# Altium PCB BASE.PcbDoc (part 3 of 5)
Units mil, origin at the board's own origin, x right, y up, seen from the top; angles counter-clockwise.
Board outline 4330.71 x 3937.01 mil, 6 copper layers (Top, GND1, SIG1, PWR, GND2, Bottom), stack 32.112 mil thick; 57 components, 250 nets, 665 pads, 350 vias.
Unrouted connection lines stored in the file: 2.
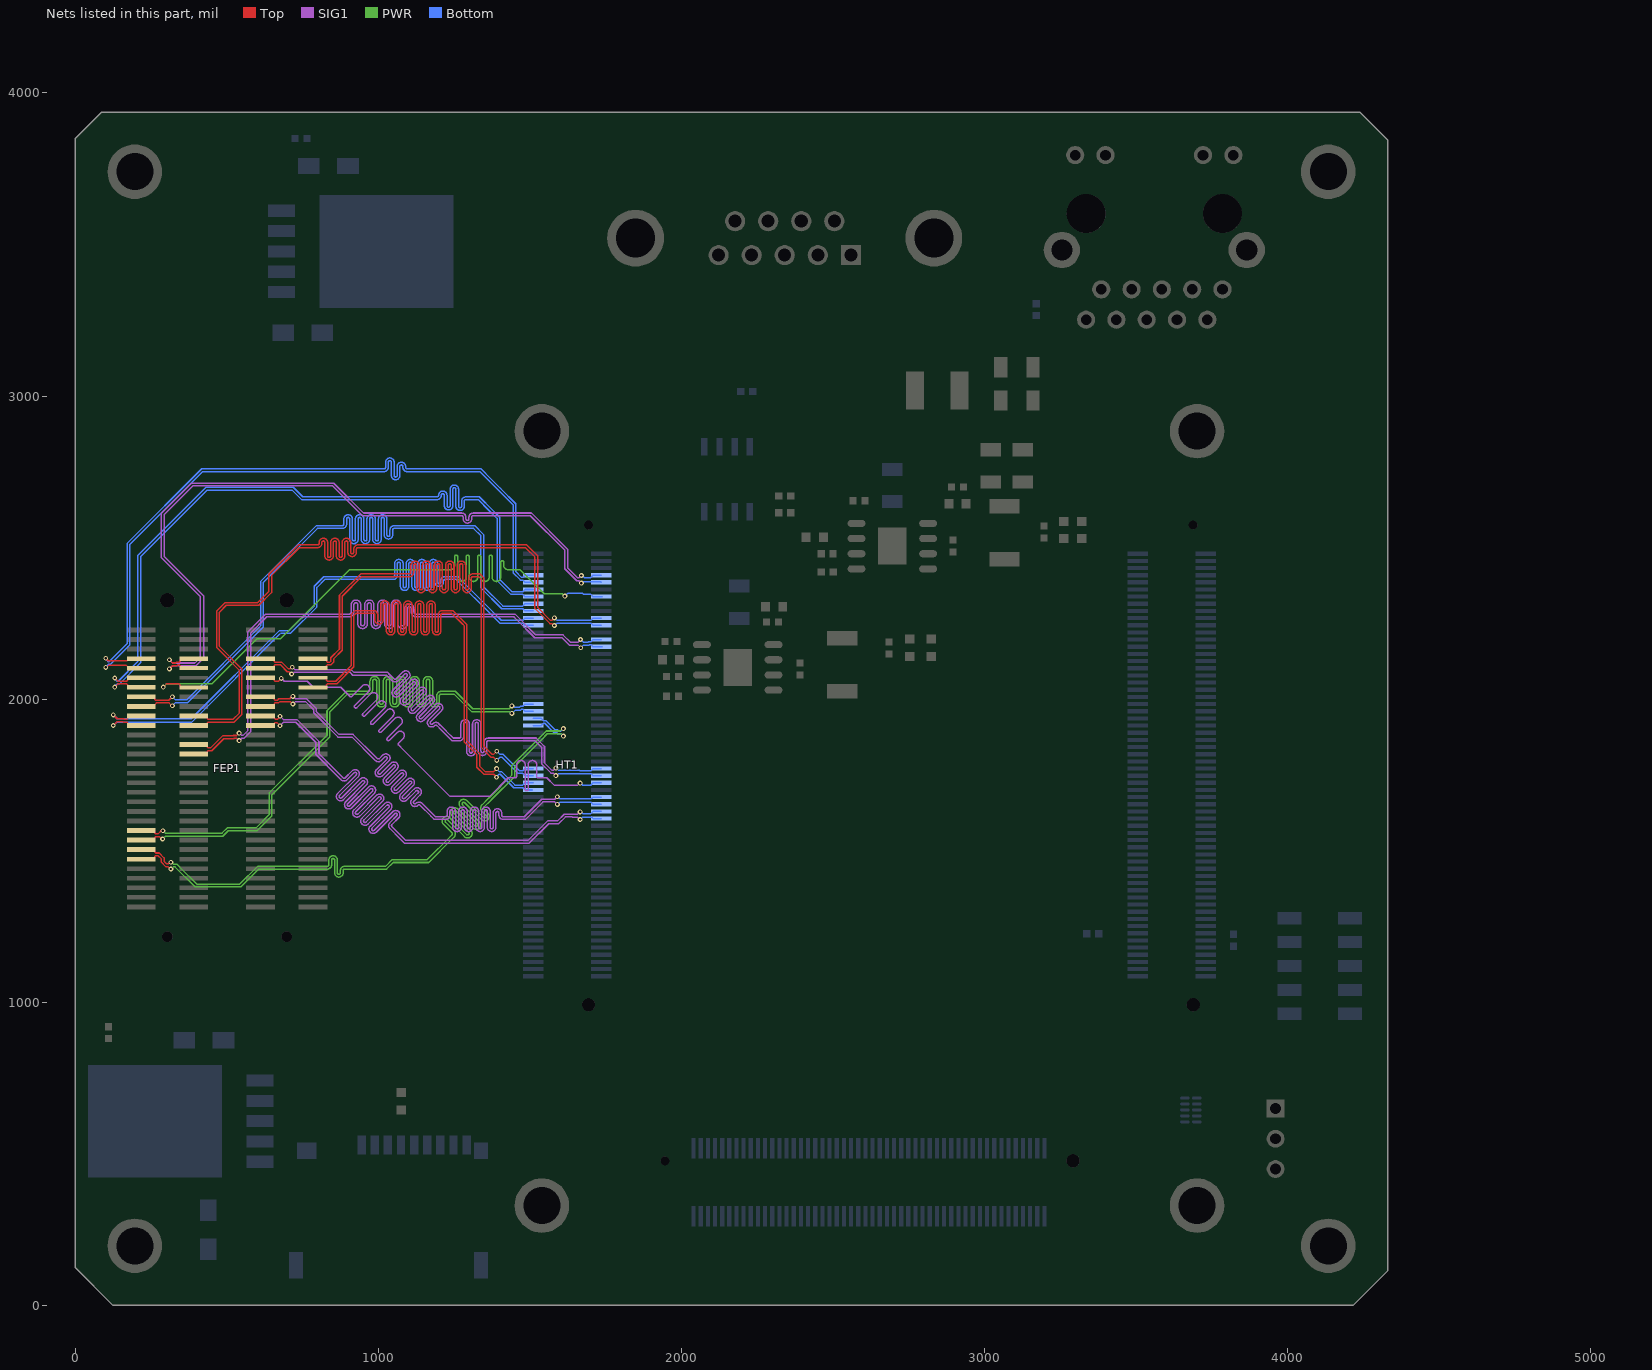
[diagram p7: the nets of this part, all layers, seen from the top]

## Via types
v1: diameter 16, hole 8, Top to Bottom, 219 vias
v2: diameter 30, hole 15, Top to Bottom, 75 vias
v3: diameter 22, hole 12, Top to Bottom, 48 vias
v4: diameter 28, hole 14, Top to Bottom, 3 vias
v5: diameter 39.37, hole 39.37, Top to Bottom, 2 vias
v6: diameter 24, hole 12, Top to Bottom, 2 vias
v7: diameter 40, hole 20, Top to Bottom, 1 vias

## Nets (pads, with @x,y where several pads share a name; then routed paths per layer and width w, separated by ;. In a path a pad name is that pad's centre, name@x,y a point inside that pad or via, vN(x,y) a via of type N, cw(c..) or ccw(c..) an arc to the next point about the centre after c; other vN are vias at no path point) (continued)
B12_L19_P: FEP1.B6 HT1.B28 | length 2434.1
  Top w5: FEP1.B6@611.18,2070.87 650.55,2070.87 655.93,2065.49 655.93,2062.55 658.85,2059.62 671.01,2059.62 679.87,2068.47 v1(679.87,2068.88)
  SIG1 w5: v1(679.87,2068.88) 680.27,2068.88 689.51,2059.64 765.54,2059.64 785.47,2039.71 876,2039.71 900.98,2014.73 905.91,2009.8 ccw(c909.47,2013.31) 913.02,2009.8 947.62,2044.4 ; 929.32,1972.36 cw(c925.79,1975.9) 922.26,1972.35 cw(c925.79,1975.9) 922.25,1979.43 967.42,2024.6 ccw(c957.55,2034.53) 967.45,2044.43 ccw(c957.55,2034.53) 947.63,2044.41 ; 929.35,1972.39 974.49,2017.53 cw(c984.42,2007.66) 994.32,2017.56 cw(c984.42,2007.66) 994.3,1997.74 949.15,1952.59 ; 949.12,1952.56 ccw(c952.66,1949.03) 949.11,1945.5 ccw(c952.66,1949.03) 956.19,1945.49 1001.36,1990.66 cw(c1011.29,1980.79) 1021.19,1990.69 cw(c1011.29,1980.79) 1021.17,1970.87 976.02,1925.72 ccw(c979.53,1922.16) 975.98,1918.63 ; 976,1918.61 ccw(c979.53,1922.16) 983.06,1918.62 ; 983.09,1918.65 1028.23,1963.79 cw(c1038.16,1953.92) 1048.06,1963.82 cw(c1038.16,1953.92) 1048.04,1944 1002.89,1898.85 ; 1002.86,1898.82 ccw(c1006.4,1895.29) 1002.85,1891.76 ccw(c1006.4,1895.29) 1009.93,1891.75 ; 1009.96,1891.78 1055.1,1936.92 ; 1029.72,1864.89 cw(c1033.27,1868.42) 1029.73,1871.95 ; 1029.74,1864.87 ccw(c1033.27,1868.42) 1036.8,1864.88 1062.3,1890.38 ; 1029.76,1871.98 1074.9,1917.12 ; 1055.11,1936.93 cw(c1065.03,1927.05) 1074.93,1936.95 cw(c1065.03,1927.05) 1074.91,1917.13 ; 1062.31,1890.39 cw(c1072.22,1880.5) 1082.12,1890.4 cw(c1072.22,1880.5) 1082.11,1870.59 ; 1082.1,1870.58 1067.17,1855.66 ccw(c1070.68,1852.09) 1067.16,1848.55 1081.69,1834.02 1150.46,1765.25 1235.2,1680.51 1368.07,1680.51 1428.34,1740.79 1444.48,1740.79 1451.48,1740.79 ccw(c1451.48,1745.79) 1456.48,1745.79 1456.48,1784.09 cw(c1470.48,1784.09) 1484.48,1784.09 1484.48,1702.67 ccw(c1489.48,1702.67) 1494.48,1702.67 1494.48,1784.09 cw(c1508.48,1784.09) 1522.48,1784.09 1522.48,1745.79 ccw(c1527.48,1745.79) 1527.48,1740.79 1549.66,1740.79 1555.8,1740.79 1580.76,1715.82 1657.28,1715.82 1664.61,1723.15 v1(1665.71,1723.15)
  Bottom w5: v1(1665.71,1723.15) 1667.46,1723.15 1674.14,1716.47 1700.84,1716.47 1708.54,1724.17 HT1.B28@1735.12,1724.17
B12_L20_N: FEP1.A5 HT1.A29 | length 2434.1
  Top w5: FEP1.A5@784.41,2102.36 824.98,2102.36 828.98,2106.36 828.98,2110.68 831.91,2113.61 844.03,2113.61 852.23,2121.81 852.23,2132.94 880.95,2161.66 880.95,2339.68 945.71,2404.43 1048.46,2404.43 1102.69,2404.43 ccw(c1102.69,2418.43) 1116.69,2418.43 1116.69,2441.28 cw(c1121.69,2441.28) 1126.69,2441.28 1126.69,2365.56 ccw(c1140.69,2365.56) 1154.69,2365.56 1154.69,2442 cw(c1159.69,2442) 1164.69,2442 1164.69,2365.56 ccw(c1178.69,2365.56) 1192.69,2365.56 1192.69,2442 cw(c1197.69,2442) 1202.69,2442 1202.69,2365.56 ccw(c1216.69,2365.56) 1230.69,2365.56 1230.69,2442 cw(c1235.69,2442) 1240.69,2442 1240.69,2365.56 ccw(c1254.69,2365.56) 1268.69,2365.56 1268.69,2442 cw(c1273.69,2442) 1278.69,2442 1278.69,2365.56 ccw(c1292.69,2365.56) 1306.69,2365.56 1306.69,2399.43 cw(c1311.69,2399.43) 1311.69,2404.43 1318.69,2404.43 1330.14,2404.43 1330.71,2405 1339.12,2396.59 1339.12,1841.93 1372.2,1808.85 1380.21,1808.85 v1(1390.71,1798.35)
  Bottom w5: v1(1390.71,1798.35) 1401.21,1808.85 1408.18,1808.85 1461.92,1755.11 1476.82,1755.11 1484.13,1747.8 HT1.A29@1510.71,1747.8
B12_L20_P: FEP1.A4 HT1.A30 | length 2433.3
  Top w5: FEP1.A4@784.41,2133.86 823.78,2133.86 829.15,2128.48 829.15,2125.54 832.08,2122.61 840.3,2122.61 843.23,2125.54 843.23,2136.67 871.95,2165.39 871.95,2343.41 941.98,2413.43 1048.46,2413.43 1102.69,2413.43 ccw(c1102.69,2418.43) 1107.69,2418.43 1107.69,2441.28 cw(c1121.69,2441.28) 1135.69,2441.28 1135.69,2365.56 ccw(c1140.69,2365.56) 1145.69,2365.56 1145.69,2442 cw(c1159.69,2442) 1173.69,2442 1173.69,2365.56 ccw(c1178.69,2365.56) 1183.69,2365.56 1183.69,2442 cw(c1197.69,2442) 1211.69,2442 1211.69,2365.56 ccw(c1216.69,2365.56) 1221.69,2365.56 1221.69,2442 cw(c1235.69,2442) 1249.69,2442 1249.69,2365.56 ccw(c1254.69,2365.56) 1259.69,2365.56 1259.69,2442 cw(c1273.69,2442) 1287.69,2442 1287.69,2365.56 ccw(c1292.69,2365.56) 1297.69,2365.56 1297.69,2399.43 cw(c1311.69,2399.43) 1311.69,2413.43 1318.69,2413.43 1326.42,2413.43 1326.98,2414 1334.44,2414 1348.12,2400.32 1348.12,1845.66 1375.93,1817.85 1380.21,1817.85 v1(1390.71,1828.35)
  Bottom w5: v1(1390.71,1828.35) 1401.21,1817.85 1411.9,1817.85 1465.64,1764.11 1476.82,1764.11 1484.13,1771.42 HT1.A30@1510.71,1771.42
B12_L21_N: FEP1.A7 HT1.A27 | length 2433.9
  Top w5: FEP1.A7@784.41,2039.37 824.98,2039.37 828.98,2043.37 828.98,2047.69 831.91,2050.62 863.04,2050.62 919.2,2106.78 919.2,2275.76 927.07,2283.64 983.71,2283.64 cw(c983.71,2278.64) 988.71,2278.64 988.71,2261.9 ccw(c1002.71,2261.9) 1016.71,2261.9 1016.71,2310.22 cw(c1021.71,2310.22) 1026.71,2310.22 1026.71,2226.06 ccw(c1040.71,2226.06) 1054.71,2226.06 1054.71,2310.22 cw(c1059.71,2310.22) 1064.71,2310.22 1064.71,2226.06 ccw(c1078.71,2226.06) 1092.71,2226.06 1092.71,2310.22 cw(c1097.71,2310.22) 1102.71,2310.22 1102.71,2226.06 ccw(c1116.71,2226.06) 1130.71,2226.06 1130.71,2310.22 cw(c1135.71,2310.22) 1140.71,2310.22 1140.71,2226.06 ccw(c1154.71,2226.06) 1168.71,2226.06 1168.71,2310.22 cw(c1173.71,2310.22) 1178.71,2310.22 1178.71,2226.06 ccw(c1192.71,2226.06) 1206.71,2226.06 1206.71,2278.64 cw(c1211.71,2278.64) 1211.71,2283.64 1241.89,2283.64 1278.37,2247.15 1282.71,2242.81 1282.71,1860.02 1325.07,1817.66 1325.07,1775.64 1348.31,1752.4 1380.56,1752.4 1389.98,1742.97 v1(1389.98,1742.83)
  Bottom w5: v1@1386.56,1744.78 1388.51,1742.83 v1(1389.98,1742.83) 1389.98,1744.19 1398.19,1752.4 1402.33,1752.4 1446.87,1707.86 1476.82,1707.86 1484.13,1700.55 HT1.A27@1506.98,1700.55
B12_L21_P: FEP1.A6 HT1.A28 | length 2433.3
  Top w5: FEP1.A6@784.41,2070.87 824.98,2070.87 828.98,2066.87 828.98,2062.55 831.91,2059.62 859.31,2059.62 910.2,2110.51 910.2,2279.49 923.34,2292.64 983.71,2292.64 cw(c983.71,2278.64) 997.71,2278.64 997.71,2261.9 ccw(c1002.71,2261.9) 1007.71,2261.9 1007.71,2310.22 cw(c1021.71,2310.22) 1035.71,2310.22 1035.71,2226.06 ccw(c1040.71,2226.06) 1045.71,2226.06 1045.71,2310.22 cw(c1059.71,2310.22) 1073.71,2310.22 1073.71,2226.06 ccw(c1078.71,2226.06) 1083.71,2226.06 1083.71,2310.22 cw(c1097.71,2310.22) 1111.71,2310.22 1111.71,2226.06 ccw(c1116.71,2226.06) 1121.71,2226.06 1121.71,2310.22 cw(c1135.71,2310.22) 1149.71,2310.22 1149.71,2226.06 ccw(c1154.71,2226.06) 1159.71,2226.06 1159.71,2310.22 cw(c1173.71,2310.22) 1187.71,2310.22 1187.71,2226.06 ccw(c1192.71,2226.06) 1197.71,2226.06 1197.71,2278.64 cw(c1211.71,2278.64) 1211.71,2292.64 1245.61,2292.64 1291.71,2246.54 1291.71,1863.75 1334.07,1821.39 1334.07,1779.36 1352.04,1761.4 1380.56,1761.4 1390.13,1770.97 v1(1390.27,1770.97)
  Bottom w5: v1(1390.27,1770.97) 1390.27,1769.61 1398.48,1761.4 1406.06,1761.4 1450.6,1716.86 1476.82,1716.86 1484.13,1724.17 HT1.A28@1510.71,1724.17
B12_L22_N: FEP1.B11 HT1.B23 | length 2432.5
  Top w5: FEP1.B11@611.18,1913.39 650.55,1913.39 659.08,1921.91 667.28,1921.91 675.71,1913.48 v1(675.71,1912.63)
  SIG1 w5: v1(675.71,1912.63) 686.92,1923.85 727.89,1923.85 777.13,1874.61 793.47,1858.27 793.47,1818.12 872.3,1739.29 875.94,1735.65 877.22,1734.37 ccw(c887.15,1744.24) 897.08,1734.36 919.91,1757.2 ; 919.94,1757.22 cw(c923.48,1753.69) 926.99,1757.24 ; 926.99,1750.13 865.6,1688.75 ccw(c875.48,1678.82) 865.58,1668.92 ccw(c875.48,1678.82) 885.39,1668.94 946.78,1730.33 ; 927.01,1750.15 ccw(c923.48,1753.69) 927.03,1757.2 ; 946.21,1608.13 ccw(c956.09,1598.21) 946.19,1588.31 ccw(c956.09,1598.21) 966,1588.33 ; 946.21,1608.14 1007.6,1669.52 ; 946.81,1730.35 cw(c950.35,1726.82) 953.86,1730.37 ; 953.86,1723.26 892.47,1661.88 ccw(c902.35,1651.95) 892.45,1642.05 ccw(c902.35,1651.95) 912.26,1642.07 973.65,1703.46 ; 953.88,1723.28 ccw(c950.35,1726.82) 953.9,1730.33 ; 966.01,1588.34 1027.39,1649.72 ; 973.07,1581.26 ccw(c982.96,1571.34) 973.06,1561.44 ccw(c982.96,1571.34) 992.87,1561.46 1053.87,1622.46 ; 973.08,1581.27 1034.46,1642.65 ; 973.68,1703.48 cw(c977.21,1699.95) 980.73,1703.5 ; 980.73,1696.39 919.34,1635.01 ccw(c929.22,1625.08) 919.32,1615.18 ccw(c929.22,1625.08) 939.13,1615.2 1000.52,1676.59 ; 980.75,1696.41 ccw(c977.22,1699.95) 980.77,1703.46 ; 1000.55,1676.61 cw(c1004.08,1673.08) 1007.6,1676.63 ; 1007.62,1669.54 ccw(c1004.09,1673.08) 1007.64,1676.59 ; 1027.42,1649.74 cw(c1030.95,1646.21) 1034.47,1649.76 ; 1034.49,1642.67 ccw(c1030.95,1646.21) 1034.51,1649.72 ; 1053.9,1622.48 cw(c1057.43,1618.95) 1060.95,1622.5 ; 1060.99,1622.46 cw(c1057.43,1618.95) 1060.97,1615.41 1038.5,1592.94 ccw(c1048.37,1583.02) 1038.5,1573.09 1056.44,1555.15 1060.08,1551.52 1086.59,1525 1497.56,1525 1561.91,1589.35 1594.63,1589.35 1617.07,1611.79 1639.98,1611.79 1641.16,1610.6 1657.28,1610.6 1664.73,1603.15 v1(1665.71,1603.15)
  Bottom w5: v1(1665.71,1603.15) 1666.29,1603.15 1674.14,1611 1701.22,1611 1701.77,1610.45 1704.15,1610.45 1708.54,1606.06 HT1.B23@1735.12,1606.06
B12_L22_P: FEP1.B10 HT1.B24 | length 2433.7
  Top w5: FEP1.B10@611.18,1944.88 650.55,1944.88 661.19,1934.24 667.75,1934.24 675.71,1942.2 v1(675.71,1944.06)
  SIG1 w5: v1(675.71,1944.06) 686.92,1932.85 731.62,1932.85 777.42,1887.04 804.32,1860.14 804.32,1819.99 878.67,1745.65 882.3,1742.02 883.6,1740.72 ccw(c887.15,1744.24) 890.71,1740.72 913.55,1763.56 cw(c923.48,1753.69) 933.37,1763.59 cw(c923.48,1753.69) 933.36,1743.77 871.97,1682.38 ; 871.95,1675.28 ccw(c875.48,1678.82) 879.01,1675.29 ; 871.94,1675.29 cw(c875.48,1678.82) 871.94,1682.36 ; 879.04,1675.31 940.42,1736.69 cw(c950.35,1726.82) 960.24,1736.72 cw(c950.35,1726.82) 960.23,1716.9 898.84,1655.51 ; 898.81,1655.49 ccw(c902.35,1651.95) 898.81,1648.42 ccw(c902.35,1651.95) 905.88,1648.42 ; 905.91,1648.44 967.29,1709.82 ; 925.68,1621.55 cw(c929.22,1625.08) 925.68,1628.62 ; 925.69,1621.54 ccw(c929.22,1625.08) 932.75,1621.55 994.16,1682.95 cw(c1004.08,1673.08) 1013.98,1682.98 cw(c1004.09,1673.08) 1013.97,1663.16 952.58,1601.77 ccw(c956.09,1598.21) 952.55,1594.68 ; 925.71,1628.64 987.09,1690.02 ; 952.56,1594.67 ccw(c956.09,1598.21) 959.62,1594.68 ; 959.65,1594.7 1021.03,1656.08 ; 967.3,1709.83 cw(c977.21,1699.95) 987.11,1709.85 cw(c977.22,1699.95) 987.1,1690.03 ; 979.42,1574.88 ccw(c982.96,1571.34) 979.42,1567.81 ccw(c982.96,1571.34) 986.49,1567.81 ; 979.45,1574.9 1040.83,1636.28 ; 986.52,1567.83 1047.51,1628.82 ; 1021.04,1656.09 cw(c1030.95,1646.21) 1040.85,1656.11 cw(c1030.95,1646.21) 1040.84,1636.29 ; 1047.52,1628.83 cw(c1057.43,1618.95) 1067.33,1628.85 cw(c1057.43,1618.95) 1067.32,1609.03 ; 1067.31,1609.02 1044.86,1586.58 ccw(c1048.37,1583.02) 1044.85,1579.47 1062.81,1561.51 1066.44,1557.88 1084.36,1539.95 1090.32,1534 1493.83,1534 1558.18,1598.35 1590.91,1598.35 1613.34,1620.79 1657.28,1620.79 1664.64,1628.15 v1(1665.71,1628.15)
  Bottom w5: v1(1665.71,1628.15) 1668.54,1628.15 1674.14,1622.56 1701.41,1622.56 1708.54,1629.68 HT1.B24@1735.12,1629.68
B12_L23_N: FEP1.B9 HT1.B25 | length 2442.8
  Top w5: FEP1.B9@607.45,1976.38 FEP1.B9@611.18,1976.38 650.55,1976.38 655.93,1981.75 655.93,1984.7 658.85,1987.63 670.8,1987.63 675.52,1992.35 709.63,1992.35 717.78,1984.2 v1(718.06,1984.2) ; v1@714.52,1986.3 v1@717.81,1983.01
  SIG1 w5: v1(718.06,1984.2) 718.33,1984.2 726.48,1992.35 759.36,1992.35 786.71,1965 786.71,1955.27 866.98,1875 912.98,1875 985.06,1802.92 989.98,1798 ccw(c999.91,1807.87) 1009.83,1797.99 1021.14,1809.3 cw(c1024.7,1805.79) 1028.22,1809.34 ; 1020.45,1740.73 ccw(c1030.34,1730.81) 1020.44,1720.91 ccw(c1030.34,1730.81) 1040.25,1720.93 1074.88,1755.56 ; 1020.46,1740.74 1055.08,1775.35 ; 1028.21,1802.22 993.59,1767.61 ccw(c1003.47,1757.68) 993.57,1747.78 ccw(c1003.47,1757.68) 1013.38,1747.8 1048.01,1782.43 ; 1028.24,1802.25 ccw(c1024.7,1805.79) 1028.26,1809.3 ; 1047.32,1713.86 ccw(c1057.21,1703.94) 1047.31,1694.04 ccw(c1057.21,1703.94) 1067.12,1694.06 1101.75,1728.69 cw(c1105.31,1725.18) 1108.83,1728.73 ; 1047.33,1713.87 1081.95,1748.48 ccw(c1078.44,1752.05) 1082,1755.56 ; 1048.03,1782.45 cw(c1051.57,1778.92) 1055.09,1782.47 cw(c1051.57,1778.92) 1055.11,1775.38 ; 1074.9,1755.58 cw(c1078.44,1752.05) 1081.96,1755.6 ; 1108.82,1721.61 1074.2,1687 ccw(c1084.08,1677.07) 1074.18,1667.17 ccw(c1084.08,1677.07) 1093.99,1667.19 1124.25,1697.45 cw(c1127.81,1693.94) 1131.33,1697.49 ; 1108.85,1721.64 ccw(c1105.31,1725.18) 1108.87,1728.69 ; 1131.32,1690.38 1110.95,1670.01 ccw(c1120.83,1660.08) 1110.93,1650.18 ccw(c1120.83,1660.08) 1130.74,1650.2 cw(c1134.26,1646.65) 1137.81,1650.17 1173.34,1614.64 ; 1131.35,1690.4 ccw(c1127.81,1693.94) 1131.37,1697.46 ; 1173.37,1614.61 1178.3,1609.68 1184.55,1603.43 1214.94,1603.43 1221.94,1603.43 ccw(c1221.94,1617.43) 1235.94,1617.43 1235.94,1630.19 cw(c1240.94,1630.19) 1245.94,1630.19 1245.94,1577.37 ccw(c1259.94,1577.37) 1273.94,1577.37 1273.94,1630.19 cw(c1278.94,1630.19) 1283.94,1630.19 1283.94,1577.37 ccw(c1297.94,1577.37) 1311.94,1577.37 1311.94,1630.19 cw(c1316.94,1630.19) 1321.94,1630.19 1321.94,1577.37 ccw(c1335.94,1577.37) 1349.94,1577.37 1349.94,1630.19 cw(c1354.94,1630.19) 1359.94,1630.19 1359.94,1577.37 ccw(c1373.94,1577.37) 1387.94,1577.37 1387.94,1624.72 cw(c1392.94,1624.72) 1397.94,1624.72 1397.94,1617.43 ccw(c1411.94,1617.43) 1411.94,1603.43 1435.46,1603.43 1485.33,1603.43 1543.06,1661.15 1582.28,1661.15 1590.28,1653.15 v1(1590.71,1653.15)
  Bottom w5: v1(1590.71,1653.15) 1592.35,1653.15 1599.14,1659.93 1701.92,1659.93 1708.54,1653.31 HT1.B25@1735.12,1653.31
B12_L23_P: FEP1.B8 HT1.B26 | length 2433.9
  Top w5: FEP1.B8@611.18,2007.87 650.55,2007.87 655.93,2002.5 655.93,1999.56 658.85,1996.63 667.07,1996.63 671.79,2001.35 707.82,2001.35 715.97,2009.5 v1(718.06,2009.5)
  SIG1 w5: v1(718.06,2009.5) 718.33,2009.5 726.48,2001.35 763.09,2001.35 795.71,1968.73 795.71,1959 870.71,1884 916.71,1884 991.43,1809.28 996.36,1804.35 ccw(c999.91,1807.87) 1003.46,1804.35 1014.78,1815.66 ; 999.93,1754.15 cw(c1003.47,1757.68) 999.93,1761.22 ; 999.94,1754.14 ccw(c1003.47,1757.68) 1007,1754.15 1041.65,1788.79 cw(c1051.57,1778.92) 1061.47,1788.81 cw(c1051.57,1778.92) 1061.45,1769 1026.83,1734.37 ccw(c1030.34,1730.81) 1026.8,1727.28 ; 999.96,1761.24 1034.57,1795.86 ; 1014.78,1815.67 cw(c1024.7,1805.79) 1034.6,1815.68 cw(c1024.7,1805.79) 1034.58,1795.87 ; 1026.81,1727.27 ccw(c1030.34,1730.81) 1033.87,1727.28 ; 1033.9,1727.3 1068.52,1761.92 cw(c1078.44,1752.05) 1088.34,1761.94 cw(c1078.44,1752.05) 1088.32,1742.13 ; 1053.67,1707.48 ccw(c1057.21,1703.94) 1053.67,1700.41 ccw(c1057.21,1703.94) 1060.74,1700.41 ; 1053.7,1707.5 1088.31,1742.12 ; 1060.77,1700.43 1095.39,1735.05 cw(c1105.31,1725.18) 1115.21,1735.07 cw(c1105.31,1725.18) 1115.19,1715.26 1080.57,1680.63 ; 1080.54,1680.61 ccw(c1084.08,1677.07) 1080.54,1673.55 ccw(c1084.08,1677.07) 1087.61,1673.54 ; 1087.64,1673.56 1117.89,1703.81 cw(c1127.81,1693.94) 1137.71,1703.84 cw(c1127.81,1693.94) 1137.7,1684.02 1117.32,1663.64 ; 1117.29,1663.62 ccw(c1120.83,1660.08) 1117.28,1656.55 ccw(c1120.83,1660.08) 1124.34,1656.53 ; 1124.38,1656.57 cw(c1134.26,1646.65) 1144.18,1656.52 1179.7,1621 ; 1179.73,1620.98 1184.67,1616.04 1188.28,1612.43 1214.94,1612.43 1221.94,1612.43 ccw(c1221.94,1617.43) 1226.94,1617.43 1226.94,1630.19 cw(c1240.94,1630.19) 1254.94,1630.19 1254.94,1577.37 ccw(c1259.94,1577.37) 1264.94,1577.37 1264.94,1630.19 cw(c1278.94,1630.19) 1292.94,1630.19 1292.94,1577.37 ccw(c1297.94,1577.37) 1302.94,1577.37 1302.94,1630.19 cw(c1316.94,1630.19) 1330.94,1630.19 1330.94,1577.37 ccw(c1335.94,1577.37) 1340.94,1577.37 1340.94,1630.19 cw(c1354.94,1630.19) 1368.94,1630.19 1368.94,1577.37 ccw(c1373.94,1577.37) 1378.94,1577.37 1378.94,1624.72 cw(c1392.94,1624.72) 1406.94,1624.72 1406.94,1617.43 ccw(c1411.94,1617.43) 1411.94,1612.43 1435.46,1612.43 1481.61,1612.43 1539.33,1670.15 1582.28,1670.15 1590.28,1678.15 v1(1590.71,1678.15)
  Bottom w5: v1(1590.71,1678.15) 1593.08,1678.15 1599.74,1671.49 1701.22,1671.49 1702.27,1672.54 1704.15,1672.54 1708.54,1676.93 HT1.B26@1735.12,1676.93
B12_L24_N: FEP1.B5 HT1.B29 | length 2434.1
  Top w5: FEP1.B5@611.18,2102.36 650.55,2102.36 655.93,2107.74 655.93,2110.68 658.85,2113.61 676.93,2113.61 699.65,2090.9 705.63,2090.9 713.4,2083.12 v1(714.06,2083.12)
  SIG1 w5: v1(714.06,2083.12) 716.82,2083.12 722.49,2088.79 906.17,2088.79 915.71,2079.25 1027.08,2079.25 1040.24,2066.09 1043.88,2062.45 1045.18,2061.15 ccw(c1055.13,2071.06) 1065.08,2061.15 1087.11,2083.17 ; 1087.12,2083.18 cw(c1090.66,2079.66) 1094.19,2076.11 ; 1094.18,2076.1 1049.14,2031.07 ccw(c1059.07,2021.14) 1049.14,2011.21 ccw(c1059.07,2021.14) 1069,2011.21 1114.04,2056.25 cw(c1117.6,2052.74) 1121.12,2049.19 ; 1121.11,2049.18 1076.07,2004.14 ccw(c1086,1994.21) 1095.93,1984.28 1140.97,2029.32 ; 1140.98,2029.33 cw(c1144.53,2025.81) 1148.04,2029.38 ; 1148.09,2029.32 cw(c1144.53,2025.81) 1148.05,2022.26 1103,1977.22 ccw(c1112.93,1967.29) 1122.86,1957.36 1167.9,2002.4 cw(c1171.46,1998.89) 1174.98,1995.34 ; 1174.97,1995.33 1129.94,1950.29 ccw(c1139.87,1940.36) 1129.94,1930.44 ccw(c1139.87,1940.36) 1149.79,1930.43 1194.83,1975.48 ; 1194.84,1975.49 cw(c1198.39,1971.96) 1201.92,1968.41 1165.89,1932.39 ccw(c1175.82,1922.46) 1185.75,1912.53 1186.21,1913 cw(c1189.77,1909.48) 1193.32,1913 1207.61,1898.71 ; 1207.64,1898.69 1212.59,1893.74 1243.24,1863.09 1260.71,1863.09 1267.71,1863.09 ccw(c1267.71,1877.09) 1281.71,1877.09 1281.71,1918.59 cw(c1286.71,1918.59) 1291.71,1918.59 1291.71,1827.33 ccw(c1305.71,1827.33) 1319.71,1827.33 1319.71,1918.59 cw(c1324.71,1918.59) 1329.71,1918.59 1329.71,1828.3 ccw(c1343.71,1828.3) 1357.71,1828.3 1357.71,1858.09 cw(c1362.71,1858.09) 1362.71,1863.09 1391.38,1863.09 1516.48,1863.09 1539.25,1840.32 1539.25,1786.31 1569.41,1756.15 1577.28,1756.15 1585.28,1748.15 v1(1585.71,1748.15)
  Bottom w5: v1(1585.71,1748.15) 1587.67,1748.15 1594.14,1754.62 1701.72,1754.62 1708.54,1747.8 HT1.B29@1735.12,1747.8
B12_L24_P: FEP1.B4 HT1.B30 | length 2435
  Top w5: FEP1.B4@611.18,2133.86 650.55,2133.86 655.93,2128.48 655.93,2125.54 658.85,2122.61 680.66,2122.61 703.37,2099.9 707.52,2099.9 713.18,2105.56 v1(715.95,2105.56)
  SIG1 w5: v1(715.95,2105.56) 716.6,2105.56 724.37,2097.79 909.9,2097.79 919.44,2088.25 1030.81,2088.25 1031.01,2088.04 1038.02,2081.04 1038.08,2081.04 1046.63,2072.49 1049.28,2069.84 1050.27,2068.84 1051.57,2067.54 ccw(c1055.13,2071.06) 1058.68,2067.54 ; 1055.52,2017.62 cw(c1059.07,2021.14) 1055.55,2024.69 1100.59,2069.73 ccw(c1090.66,2079.66) 1080.74,2089.59 1058.69,2067.54 ; 1055.55,2017.59 ccw(c1059.07,2021.14) 1062.62,2017.62 1107.67,2062.67 cw(c1117.6,2052.74) 1127.53,2042.81 1082.49,1997.77 ; 1082.48,1997.76 ccw(c1086,1994.21) 1089.55,1990.69 1134.6,2035.74 cw(c1144.53,2025.81) 1152.93,2037.07 1153.13,2037.07 1155.78,2034.42 1155.78,2034.21 cw(c1144.53,2025.81) 1154.46,2015.88 1109.42,1970.85 ccw(c1112.93,1967.29) 1116.48,1963.77 ; 1116.49,1963.78 1161.53,2008.82 cw(c1171.46,1998.89) 1181.39,1988.96 1136.35,1943.92 ccw(c1139.87,1940.36) 1136.32,1936.84 ; 1136.34,1936.82 ccw(c1139.87,1940.36) 1143.41,1936.84 1188.46,1981.89 cw(c1198.39,1971.96) 1208.32,1962.03 1172.31,1926.02 ccw(c1175.82,1922.46) 1179.37,1918.94 1179.82,1919.39 cw(c1189.77,1909.48) 1199.72,1919.39 1212.69,1906.42 1218.98,1900.13 1219.32,1899.8 1223.71,1895.4 1247.03,1872.09 1260.71,1872.09 1267.71,1872.09 ccw(c1267.71,1877.09) 1272.71,1877.09 1272.71,1918.59 cw(c1286.71,1918.59) 1300.71,1918.59 1300.71,1827.33 ccw(c1305.71,1827.33) 1310.71,1827.33 1310.71,1918.59 cw(c1324.71,1918.59) 1338.71,1918.59 1338.71,1828.3 ccw(c1343.71,1828.3) 1348.71,1828.3 1348.71,1858.09 cw(c1362.71,1858.09) 1362.71,1872.09 1391.38,1872.09 1520.21,1872.09 1548.25,1844.05 1548.25,1790.04 1573.14,1765.15 1577.28,1765.15 1585.28,1773.15 v1(1585.71,1773.15)
  Bottom w5: v1(1585.71,1773.15) 1586.14,1773.15 1594.29,1765 1664.54,1765 1664.82,1764.72 1701.84,1764.72 1708.54,1771.42 HT1.B30@1735.12,1771.42
B13_L1_N: FEP1.C5 HT1.B56 | length 2432.6
  Top w5: v1(310.71,2100) 321.21,2110.5 335.96,2110.5 339.07,2113.61 343.21,2113.61 346.14,2110.68 346.14,2106.36 350.14,2102.36 FEP1.C5@390.71,2102.36
  SIG1 w5: v1(310.71,2100) 321.21,2110.5 398.94,2110.5 423.34,2134.91 423.34,2341.09 294.22,2470.22 294.22,2610.28 387.57,2703.64 849.34,2703.64 947.63,2605.35 1224.54,2605.35 1275,2605.35 cw(c1275,2600.35) 1280,2600.35 1280,2594.93 ccw(c1294,2594.93) 1308,2594.93 1308,2600.35 cw(c1313,2600.35) 1313,2605.35 1320,2605.35 1501.36,2605.35 1614.87,2491.84 1614.87,2430.57 1654.29,2391.15 1661.47,2391.15 1669.47,2383.15 v1(1669.9,2383.15)
  Bottom w5: v1(1669.9,2383.15) 1672.88,2383.15 1677.83,2388.11 1732.6,2388.11 HT1.B56@1735.12,2385.59
B13_L1_P: FEP1.C4 HT1.B57 | length 2434.9
  Top w5: v1(310.71,2130) 321.21,2119.5 332.23,2119.5 335.34,2122.61 343.04,2122.61 345.96,2125.54 345.96,2128.48 351.34,2133.86 FEP1.C4@390.71,2133.86 ; v1@1669.47,2408.15 v1(1669.9,2408.15)
  SIG1 w5: v1(310.71,2130) 321.21,2119.5 395.21,2119.5 412.46,2136.75 412.46,2339.25 283.99,2467.72 283.99,2612.78 383.84,2712.64 853.07,2712.64 951.36,2614.35 1224.54,2614.35 1275,2614.35 cw(c1275,2600.35) 1289,2600.35 1289,2594.93 ccw(c1294,2594.93) 1299,2594.93 1299,2600.35 cw(c1313,2600.35) 1313,2614.35 1320,2614.35 1435.08,2614.35 ; 1435.08,2614.35 1505.08,2614.35 1624.52,2494.91 1624.52,2433.65 1658.02,2400.15 1661.47,2400.15 1669.47,2408.15 v1(1669.9,2408.15)
  Bottom w5: v1(1669.9,2408.15) 1672.88,2408.15 1679.95,2401.08 1700.41,2401.08 1708.54,2409.21 HT1.B57@1735.12,2409.21
B13_L2_N: FEP1.D5 HT1.A56 | length 2411.6
  Top w5: v1(100.71,2105) 103.69,2105 111.41,2112.72 167.75,2112.72 178.11,2102.36 FEP1.D5@217.48,2102.36
  Bottom w5: v1(100.71,2105) 100.71,2105.49 110.47,2115.26 116.1,2115.26 179.99,2179.15 179.99,2510 420.99,2751 1012.04,2751 1019.04,2751 ccw(c1019.04,2765) 1033.04,2765 1033.04,2782 cw(c1038.04,2782) 1043.04,2782 1043.04,2738 ccw(c1057.04,2738) 1071.04,2738 1071.04,2767.75 cw(c1076.04,2767.75) 1081.04,2767.75 1081.04,2765 ccw(c1095.04,2765) 1095.04,2751 1135,2751 1334.71,2751 1360.71,2725 1444.34,2641.36 1444.34,2417.5 1468.94,2392.9 1476.82,2392.9 1484.13,2385.59 HT1.A56@1506.98,2385.59
B13_L2_P: FEP1.D4 HT1.A57 | length 2415.7
  Top w5: v1(100.71,2135) 101.2,2135 109.14,2127.06 171.31,2127.06 178.11,2133.86 FEP1.D4@217.48,2133.86
  Bottom w5: v1(100.71,2135) 100.71,2132.02 105.06,2127.67 105.06,2127.43 108.23,2124.26 112.37,2124.26 170.99,2182.88 170.99,2513.73 417.26,2760 1012.04,2760 1019.04,2760 ccw(c1019.04,2765) 1024.04,2765 1024.04,2782 cw(c1038.04,2782) 1052.04,2782 1052.04,2738 ccw(c1057.04,2738) 1062.04,2738 1062.04,2767.75 cw(c1076.04,2767.75) 1090.04,2767.75 1090.04,2765 ccw(c1095.04,2765) 1095.04,2760 1135,2760 1338.44,2760 1373.14,2725.29 1403.05,2695.38 1453.34,2645.09 1453.34,2421.23 1472.67,2401.9 1476.82,2401.9 1484.13,2409.21 HT1.A57@1510.71,2409.21
B13_L3_N: FEP1.D9 HT1.A52 | length 2431.7
  Top w5: FEP1.D9@217.48,1976.38 256.85,1976.38 268.1,1987.63 309.9,1987.63 319.18,1978.35 v1(320.71,1978.35)
  Bottom w5: v1(320.71,1978.35) 331.21,1988.85 371.63,1988.85 620.71,2237.93 620.71,2385 799.34,2563.64 874.48,2563.64 881.48,2563.64 ccw(c881.48,2577.64) 895.48,2577.64 895.48,2594.64 cw(c900.48,2594.64) 905.48,2594.64 905.48,2527.27 ccw(c919.48,2527.27) 933.48,2527.27 933.48,2594.64 cw(c938.48,2594.64) 943.48,2594.64 943.48,2527.27 ccw(c957.48,2527.27) 971.48,2527.27 971.48,2594.64 cw(c976.48,2594.64) 981.48,2594.64 981.48,2527.27 ccw(c995.48,2527.27) 1009.48,2527.27 1009.48,2594.64 cw(c1014.48,2594.64) 1019.48,2594.64 1019.48,2542.22 ccw(c1033.48,2542.22) 1047.48,2542.22 1047.48,2558.64 cw(c1052.48,2558.64) 1052.48,2563.64 1070.71,2563.64 1314.35,2563.64 1338.45,2539.53 1338.45,2367.26 1407.3,2298.41 1476.82,2298.41 1484.13,2291.1 HT1.A52@1510.71,2291.1
B13_L3_P: FEP1.D8 HT1.A53 | length 2434.5
  Top w5: FEP1.D8@217.48,2007.87 256.85,2007.87 262.22,2002.5 262.22,1999.56 265.15,1996.63 308.99,1996.63 v1(320.71,2008.35)
  Bottom w5: v1(320.71,2008.35) 331.21,1997.85 367.9,1997.85 611.71,2241.66 611.71,2388.73 795.62,2572.64 874.48,2572.64 881.48,2572.64 ccw(c881.48,2577.64) 886.48,2577.64 886.48,2594.64 cw(c900.48,2594.64) 914.48,2594.64 914.48,2527.27 ccw(c919.48,2527.27) 924.48,2527.27 924.48,2594.64 cw(c938.48,2594.64) 952.48,2594.64 952.48,2527.27 ccw(c957.48,2527.27) 962.48,2527.27 962.48,2594.64 cw(c976.48,2594.64) 990.48,2594.64 990.48,2527.27 ccw(c995.48,2527.27) 1000.48,2527.27 1000.48,2594.64 cw(c1014.48,2594.64) 1028.48,2594.64 1028.48,2542.22 ccw(c1033.48,2542.22) 1038.48,2542.22 1038.48,2558.64 cw(c1052.48,2558.64) 1052.48,2572.64 1070.71,2572.64 1318.07,2572.64 1347.45,2543.26 1347.45,2370.98 1375.29,2343.15 1383.14,2335.29 1411.02,2307.41 1476.82,2307.41 1484.13,2314.72 HT1.A53@1510.71,2314.72
B13_L4_N: FEP1.D7 HT1.A54 | length 2435.2
  Top w5: v1(130.71,2040) 141.21,2050.5 165.55,2050.5 165.67,2050.62 169.81,2050.62 172.74,2047.69 172.74,2044.74 178.11,2039.37 FEP1.D7@217.48,2039.37
  Bottom w5: v1(130.71,2040) 130.71,2042.98 135.06,2047.33 135.06,2047.57 137.99,2050.5 145.86,2050.5 215.71,2120.35 215.71,2470 435.71,2690 715.62,2690 746.98,2658.64 1165.71,2658.64 1193.71,2658.64 ccw(c1193.71,2672.64) 1207.71,2672.64 cw(c1212.71,2672.64) 1217.71,2672.64 1217.71,2638.36 ccw(c1231.71,2638.36) 1245.71,2638.36 1245.71,2692.7 cw(c1250.71,2692.7) 1255.71,2692.7 1255.71,2636.64 ccw(c1269.71,2636.64) 1283.71,2636.64 1283.71,2653.64 cw(c1288.71,2653.64) 1288.71,2658.64 1295.71,2658.64 1329.35,2658.64 1364.34,2623.64 1391.71,2596.27 1391.71,2391.27 1437.32,2345.66 1476.82,2345.66 1484.13,2338.35 HT1.A54@1510.71,2338.35
B13_L4_P: FEP1.D6 HT1.A55 | length 2435.2
  Top w5: v1(130.71,2070) 141.21,2059.5 161.82,2059.5 161.94,2059.62 169.81,2059.62 172.74,2062.55 172.74,2065.49 178.11,2070.87 FEP1.D6@217.48,2070.87
  Bottom w5: v1(130.71,2070) 130.71,2067.02 135.06,2062.67 135.06,2062.43 137.99,2059.5 142.13,2059.5 206.71,2124.08 206.71,2473.73 431.98,2699 719.34,2699 725.71,2692.64 750.71,2667.64 1165.71,2667.64 1193.71,2667.64 ccw(c1193.71,2672.64) 1198.71,2672.64 cw(c1212.71,2672.64) 1226.71,2672.64 1226.71,2638.36 ccw(c1231.71,2638.36) 1236.71,2638.36 1236.71,2692.7 cw(c1250.71,2692.7) 1264.71,2692.7 1264.71,2636.64 ccw(c1269.71,2636.64) 1274.71,2636.64 1274.71,2653.64 cw(c1288.71,2653.64) 1288.71,2667.64 1295.71,2667.64 1333.07,2667.64 1376.78,2623.93 1400.71,2600 1400.71,2395 1441.05,2354.66 1476.82,2354.66 1484.13,2361.97 HT1.A55@1510.71,2361.97
B13_L5_N: FEP1.D11 HT1.A50 | length 2430.4
  Top w5: v1(125.71,1913.35) 138.71,1926.35 156.15,1926.35 157.86,1924.63 169.81,1924.63 172.74,1921.7 172.74,1918.76 178.11,1913.39 FEP1.D11@217.48,1913.39
  Bottom w5: v1(125.71,1913.35) 135.71,1923.35 383.44,1923.35 675.09,2215 ; 677.73,2217.64 710.29,2217.64 797.32,2304.67 797.32,2368.68 823.64,2395 1041.71,2395 1048.71,2395 ccw(c1048.71,2409) 1062.71,2409 1062.71,2447.07 cw(c1067.71,2447.07) 1072.71,2447.07 1072.71,2372.93 ccw(c1086.71,2372.93) 1100.71,2372.93 1100.71,2447.07 cw(c1105.71,2447.07) 1110.71,2447.07 1110.71,2372.93 ccw(c1124.71,2372.93) 1138.71,2372.93 1138.71,2447.07 cw(c1143.71,2447.07) 1148.71,2447.07 1148.71,2372.93 ccw(c1162.71,2372.93) 1176.71,2372.93 1176.71,2447.07 cw(c1181.71,2447.07) 1186.71,2447.07 1186.71,2386.16 ccw(c1200.71,2386.16) 1214.71,2386.16 1214.71,2390 cw(c1219.71,2390) 1219.71,2395 1241.71,2395 1256.47,2395 1374.59,2276.88 1375.01,2276.88 1400.73,2251.17 1476.82,2251.17 1484.13,2243.86 HT1.A50@1510.71,2243.86
B13_L5_P: FEP1.D10 HT1.A51 | length 2434.5
  Top w5: v1(125.71,1948.35) 138.71,1935.35 159.88,1935.35 161.59,1933.63 169.81,1933.63 172.74,1936.56 172.74,1939.51 178.11,1944.88 FEP1.D10@217.48,1944.88
  Bottom w5: v1(125.71,1948.35) 138.71,1935.35 382.71,1935.35 674,2226.64 706.56,2226.64 788.32,2308.39 788.32,2372.41 819.91,2404 1041.71,2404 1048.71,2404 ccw(c1048.71,2409) 1053.71,2409 1053.71,2447.07 cw(c1067.71,2447.07) 1081.71,2447.07 1081.71,2372.93 ccw(c1086.71,2372.93) 1091.71,2372.93 1091.71,2447.07 cw(c1105.71,2447.07) 1119.71,2447.07 1119.71,2372.93 ccw(c1124.71,2372.93) 1129.71,2372.93 1129.71,2447.07 cw(c1143.71,2447.07) 1157.71,2447.07 1157.71,2372.93 ccw(c1162.71,2372.93) 1167.71,2372.93 1167.71,2447.07 cw(c1181.71,2447.07) 1195.71,2447.07 1195.71,2386.16 ccw(c1200.71,2386.16) 1205.71,2386.16 1205.71,2390 cw(c1219.71,2390) 1219.71,2404 1241.71,2404 1262.51,2404 1270.71,2395.8 1270.71,2395.16 1379.99,2285.88 1405.71,2260.17 1476.82,2260.17 1484.13,2267.48 HT1.A51@1510.71,2267.48
B13_L6_N: FEP1.C11 HT1.B50 | length 2434.5
  Top w5: FEP1.C11@390.71,1913.39 430.08,1913.39 435.45,1918.76 435.45,1921.7 438.38,1924.63 524.72,1924.63 549.71,1949.62 549.71,2100 475.71,2174 475.71,2287.27 498.44,2310 605.71,2310 647.8,2352.09 647.8,2408.36 739.44,2500 792.71,2500 799.71,2500 ccw(c799.71,2514) 813.71,2514 813.71,2517 cw(c818.71,2517) 823.71,2517 823.71,2473 ccw(c837.71,2473) 851.71,2473 851.71,2517 cw(c856.71,2517) 861.71,2517 861.71,2473 ccw(c875.71,2473) 889.71,2473 889.71,2517 cw(c894.71,2517) 899.71,2517 899.71,2484.69 ccw(c913.71,2484.69) 927.71,2484.69 927.71,2495 cw(c932.71,2495) 932.71,2500 957.71,2500 1485.71,2500 1516.71,2469 1516.71,2298.85 1566.2,2249.36 1572.28,2249.36 1578.49,2243.15 v1(1580.71,2243.15)
  Bottom w5: v1(1580.71,2243.15) 1581.14,2243.15 1589.14,2251.15 1662.4,2251.15 1701.23,2251.17 1708.54,2243.86 HT1.B50@1735.12,2243.86
B13_L6_P: FEP1.C10 HT1.B51 | length 2434.5
  Top w5: FEP1.C10@390.71,1944.88 430.08,1944.88 435.45,1939.51 435.45,1936.56 438.38,1933.63 521,1933.63 540.71,1953.35 540.71,2096.27 466.71,2170.27 466.71,2291 494.71,2319 601.98,2319 638.8,2355.82 638.8,2412.09 735.71,2509 792.71,2509 799.71,2509 ccw(c799.71,2514) 804.71,2514 804.71,2517 cw(c818.71,2517) 832.71,2517 832.71,2473 ccw(c837.71,2473) 842.71,2473 842.71,2517 cw(c856.71,2517) 870.71,2517 870.71,2473 ccw(c875.71,2473) 880.71,2473 880.71,2517 cw(c894.71,2517) 908.71,2517 908.71,2484.69 ccw(c913.71,2484.69) 918.71,2484.69 918.71,2495 cw(c932.71,2495) 932.71,2509 957.71,2509 1489.44,2509 1525.71,2472.73 1525.71,2302.58 1568.14,2260.15 1572.28,2260.15 1580.28,2268.15 v1(1580.71,2268.15)
  Bottom w5: v1(1580.71,2268.15) 1581.14,2268.15 1589.14,2260.15 1658.68,2260.15 ; 1658.7,2260.17 1701.23,2260.17 1708.54,2267.48 HT1.B51@1735.12,2267.48
B13_L7_N: FEP1.D25 HT1.A36 | length 2435.3
  Top w5: FEP1.D25@217.48,1472.44 256.85,1472.44 262.22,1477.81 262.22,1480.76 265.15,1483.69 273.37,1483.69 284.32,1472.74 284.32,1461.87 299.45,1446.74 307.28,1446.74 314.02,1440 v1(315.71,1440)
  PWR w5: v1(315.71,1440) 317.45,1440 324.14,1446.69 329.59,1446.69 395.28,1381 546.71,1381 605.22,1439.51 824.73,1439.51 831.73,1439.51 ccw(c831.73,1453.51) 845.73,1453.51 845.73,1469.65 cw(c850.73,1469.65) 855.73,1469.65 855.73,1427.23 ccw(c869.73,1427.23) 883.73,1427.23 883.73,1434.51 cw(c888.73,1434.51) 888.73,1439.51 914.72,1439.51 1027.07,1439.51 1048.94,1461.38 1166.04,1461.38 1244.78,1540.11 1250.03,1545.37 ; 1250.06,1545.39 ccw(c1239.5,1555.95) 1251.51,1564.81 1251.51,1565.05 1250.08,1566.48 ; 1256.83,1630.23 ccw(c1253.27,1626.73) 1249.75,1623.17 1305.14,1567.78 cw(c1294.6,1557.21) 1305.18,1567.75 1306.61,1566.31 1306.61,1566.07 cw(c1294.6,1557.21) 1284.03,1546.67 1228.66,1602.04 ccw(c1225.09,1598.54) 1221.57,1594.99 1250.04,1566.52 ; 1256.85,1630.22 1312.21,1574.85 ccw(c1322.79,1585.39) 1334.8,1594.26 1334.8,1594.49 1333.36,1595.93 ccw(c1322.79,1585.39) 1333.32,1595.96 1277.94,1651.35 ; 1277.93,1651.36 cw(c1281.45,1654.91) 1285.01,1658.41 1340.39,1603.03 ccw(c1350.97,1613.57) 1362.98,1622.44 1362.98,1622.67 1361.54,1624.11 ccw(c1350.97,1613.57) 1361.51,1624.14 1348.72,1636.93 cw(c1352.23,1640.49) 1348.71,1644.04 1369.27,1664.6 ; 1369.29,1664.62 1374.56,1669.89 1449.82,1745.16 1449.82,1778.4 1540.57,1869.15 ; 1540.59,1869.15 1557.59,1886.15 1602.28,1886.15 1610.28,1878.15 v1(1610.71,1878.15) ; 1250.08,1566.49 ccw(c1239.5,1555.95) 1250.04,1566.52
  Bottom w5: HT1.A36@1510.71,1913.15 1537.28,1913.15 1544.59,1920.46 1548.74,1920.46 1578.12,1891.08 1586.71,1891.08 1591.65,1886.15 1602.28,1886.15 1610.28,1878.15 v1(1610.71,1878.15)
B13_L7_P: FEP1.D24 HT1.A37 | length 2428.1
  Top w5: FEP1.D24@217.48,1503.94 256.85,1503.94 262.22,1498.56 262.22,1495.62 265.15,1492.69 277.1,1492.69 293.32,1476.47 293.32,1465.6 302.05,1456.86 307.32,1456.86 v1@310.72,1460.27
  PWR w5: v1(315.74,1462.43) 317.43,1462.43 324.17,1455.69 336.08,1455.69 344.28,1447.49 344.28,1446.56 400.83,1390 542.98,1390 601.49,1448.51 824.73,1448.51 831.73,1448.51 ccw(c831.73,1453.51) 836.73,1453.51 836.73,1469.65 cw(c850.73,1469.65) 864.73,1469.65 864.73,1427.23 ccw(c869.73,1427.23) 874.73,1427.23 874.73,1434.51 cw(c888.73,1434.51) 888.73,1448.51 914.72,1448.51 1023.34,1448.51 1045.21,1470.38 1161,1470.38 1237.76,1547.13 1243.01,1552.39 ccw(c1239.5,1555.95) 1243.01,1559.51 1214.55,1587.97 cw(c1225.09,1598.54) 1233.95,1610.55 1234.19,1610.55 1235.62,1609.12 cw(c1225.09,1598.54) 1235.66,1609.08 1291.04,1553.7 ccw(c1294.6,1557.21) 1298.11,1560.77 ; 1298.1,1560.79 1242.73,1616.15 cw(c1253.27,1626.73) 1262.13,1638.74 1262.37,1638.74 1263.81,1637.3 cw(c1253.27,1626.73) 1263.84,1637.26 1319.23,1581.88 ; 1319.24,1581.87 ccw(c1322.79,1585.39) 1326.29,1588.95 ; 1326.28,1588.97 1270.91,1644.33 cw(c1281.45,1654.91) 1290.32,1666.92 1290.55,1666.92 1291.99,1665.48 cw(c1281.45,1654.91) 1292.02,1665.44 1347.41,1610.06 ccw(c1350.97,1613.57) 1354.47,1617.14 1341.69,1629.92 cw(c1352.23,1640.49) 1341.69,1651.07 1362.25,1671.62 ; 1362.27,1671.64 1367.54,1676.91 1440.82,1750.2 1440.82,1782.13 1536.84,1878.15 1553.84,1895.15 1599.34,1895.15 1603.06,1898.88 1603.46,1898.88 1607.73,1903.15 v1(1610.71,1903.15)
  Bottom w5: HT1.A37@1510.71,1936.77 1537.28,1936.77 1544.59,1929.46 1552.47,1929.46 1581.85,1900.08 1590.44,1900.08 1595.37,1895.15 1602.28,1895.15 1610.28,1903.15 v1(1610.71,1903.15)
B13_L8_N: FEP1.D23 HT1.A38 | length 2435.5
  Top w5: FEP1.D23@217.48,1535.43 256.85,1535.43 262.22,1540.81 262.22,1543.75 265.15,1546.68 277.18,1546.68 284.85,1539 v1(288.18,1539)
  PWR w5: v1(288.18,1539) 288.69,1539 297.79,1548.11 487.01,1548.11 505.04,1566.14 599.58,1566.14 649.01,1615.57 649.01,1684.95 839.71,1875.65 839.71,1958.15 898.71,2017.15 904.13,2017.15 965.92,2017.15 ccw(c965.92,2032.65) 981.42,2032.65 981.42,2059.29 cw(c987.92,2059.29) 994.42,2059.29 994.42,1989.9 ccw(c1009.92,1989.9) 1025.42,1989.9 1025.42,2059.3 cw(c1031.92,2059.3) 1038.42,2059.3 1038.42,1989.9 ccw(c1053.92,1989.9) 1069.42,1989.9 1069.42,2059.3 cw(c1075.92,2059.3) 1082.42,2059.3 1082.42,1989.9 ccw(c1097.92,1989.9) 1113.42,1989.9 1113.42,2059.3 cw(c1119.92,2059.3) 1126.42,2059.3 1126.42,1989.9 ccw(c1141.92,1989.9) 1157.42,1989.9 1157.42,2059.3 cw(c1163.92,2059.3) 1170.42,2059.3 1170.42,1989.9 ccw(c1185.92,1989.9) 1201.42,1989.9 1201.42,2010.65 cw(c1207.92,2010.65) 1207.92,2017.15 1214.92,2017.15 1249.96,2017.15 1307.67,1959.45 1433.98,1959.45 1440.28,1953.15 v1(1440.71,1953.15)
  Bottom w5: v1(1440.71,1953.15) 1441.14,1953.15 1452.27,1964.29 1469.25,1964.29 1472.67,1967.7 1476.82,1967.7 1484.13,1960.39 HT1.A38@1510.71,1960.39
B13_L8_P: FEP1.D22 HT1.A39 | length 2432.4
  Top w5: FEP1.D22@217.48,1566.93 256.85,1566.93 262.22,1561.56 262.22,1558.61 265.15,1555.68 273.37,1555.68 v1@285.71,1568.02
  PWR w5: v1(289.2,1566.21) 289.88,1566.21 297.63,1558.46 484.56,1558.46 501.52,1575.42 596.13,1575.42 639.63,1618.93 639.63,1690.3 830.71,1881.37 830.71,1961.88 894.98,2026.15 904.13,2026.15 965.92,2026.15 ccw(c965.92,2032.65) 972.42,2032.65 972.42,2059.29 cw(c987.92,2059.29) 1003.42,2059.29 1003.42,1989.9 ccw(c1009.92,1989.9) 1016.42,1989.9 1016.42,2059.3 cw(c1031.92,2059.3) 1047.42,2059.3 1047.42,1989.9 ccw(c1053.92,1989.9) 1060.42,1989.9 1060.42,2059.3 cw(c1075.92,2059.3) 1091.42,2059.3 1091.42,1989.9 ccw(c1097.92,1989.9) 1104.42,1989.9 1104.42,2059.3 cw(c1119.92,2059.3) 1135.42,2059.3 1135.42,1989.9 ccw(c1141.92,1989.9) 1148.42,1989.9 1148.42,2059.3 cw(c1163.92,2059.3) 1179.42,2059.3 1179.42,1989.9 ccw(c1185.92,1989.9) 1192.42,1989.9 1192.42,2010.65 cw(c1207.92,2010.65) 1207.92,2026.15 1214.92,2026.15 1253.69,2026.15 1311.4,1968.45 1431.89,1968.45 1440.28,1976.83 1440.28,1978.15 v1(1440.71,1978.15)
  Bottom w5: v1(1440.71,1978.15) 1443.69,1978.15 1448.44,1973.39 1465.63,1973.39 1468.94,1976.7 1476.82,1976.7 1484.13,1984.02 HT1.A39@1510.71,1984.02
B13_L9_N: FEP1.C14 HT1.B47 | length 2437.5
  Top w5: FEP1.C14@390.71,1818.9 430.08,1818.9 435.45,1824.27 435.45,1827.22 438.38,1830.15 450.33,1830.15 490.05,1869.86 523.54,1869.86 525.02,1871.35 532.28,1871.35 540.28,1863.35 v1(540.71,1863.35)
  SIG1 w5: v1(540.71,1863.35) 541.14,1863.35 549.14,1871.35 557.01,1871.35 578.92,1893.26 578.92,1919.22 ; 578.95,1919.25 578.95,2218.86 632.07,2271.98 897.2,2271.98 904.2,2271.98 ccw(c904.2,2287.48) 919.7,2287.48 919.7,2311.6 cw(c926.2,2311.6) 932.7,2311.6 932.7,2248.49 ccw(c948.2,2248.49) 963.7,2248.49 963.7,2311.6 cw(c970.2,2311.6) 976.7,2311.6 976.7,2248.49 ccw(c992.2,2248.49) 1007.7,2248.49 1007.7,2311.6 cw(c1014.2,2311.6) 1020.7,2311.6 1020.7,2248.49 ccw(c1036.2,2248.49) 1051.7,2248.49 1051.7,2311.6 cw(c1058.2,2311.6) 1064.7,2311.6 1064.7,2248.49 ccw(c1080.2,2248.49) 1095.7,2248.49 1095.7,2298.5 cw(c1102.2,2298.5) 1108.7,2298.5 1108.7,2287.48 ccw(c1124.2,2287.48) 1124.2,2271.98 1149.14,2271.98 1447.07,2271.98 1455.71,2263.35 1515.94,2203.11 1605.71,2203.11 1630.03,2178.79 1658.35,2178.79 1667.53,2169.62 v1(1667.97,2169.62)
  Bottom w5: v1(1667.97,2169.62) 1667.97,2170.07 1676.7,2178.79 1695.57,2178.79 1697.08,2180.3 1701.23,2180.3 1708.54,2172.99 HT1.B47@1735.12,2172.99 HT1.B47@1738.85,2172.99
B13_L9_P: FEP1.C13 HT1.B48 | length 2433.6
  Top w5: FEP1.C13@390.71,1850.39 430.08,1850.39 435.45,1845.02 435.45,1842.07 438.38,1839.15 446.6,1839.15 486.32,1878.86 519.81,1878.86 521.29,1880.35 532.28,1880.35 540.28,1888.35 v1(540.71,1888.35)
  SIG1 w5: v1(540.71,1888.35) 541.25,1888.35 549.14,1880.46 553.28,1880.46 569.92,1897.1 569.92,2222.56 628.34,2280.98 897.2,2280.98 904.2,2280.98 ccw(c904.2,2287.48) 910.7,2287.48 910.7,2311.6 cw(c926.2,2311.6) 941.7,2311.6 941.7,2248.49 ccw(c948.2,2248.49) 954.7,2248.49 954.7,2311.6 cw(c970.2,2311.6) 985.7,2311.6 985.7,2248.49 ccw(c992.2,2248.49) 998.7,2248.49 998.7,2311.6 cw(c1014.2,2311.6) 1029.7,2311.6 1029.7,2248.49 ccw(c1036.2,2248.49) 1042.7,2248.49 1042.7,2311.6 cw(c1058.2,2311.6) 1073.7,2311.6 1073.7,2248.49 ccw(c1080.2,2248.49) 1086.7,2248.49 1086.7,2298.5 cw(c1102.2,2298.5) 1117.7,2298.5 1117.7,2287.48 ccw(c1124.2,2287.48) 1124.2,2280.98 1149.14,2280.98 1450.8,2280.98 1519.67,2212.11 1609.44,2212.11 1633.76,2187.79 1658.35,2187.79 1667.08,2196.52 v1(1667.08,2196.96)
  Bottom w5: v1(1667.08,2196.96) 1667.53,2196.96 1676.7,2187.79 1691.84,2187.79 1693.35,2189.3 1701.23,2189.3 1708.54,2196.61 HT1.B48@1735.12,2196.61
B13_L10_N: FEP1.C7 HT1.B54 | length 2438.3
  Top w5: v1(290.71,2040) 301.21,2050.5 338.95,2050.5 339.07,2050.62 343.21,2050.62 346.14,2047.69 346.14,2043.37 350.14,2039.37 FEP1.C7@390.71,2039.37
  PWR w5: v1(290.71,2040) 301.21,2050.5 358.03,2050.5 450.5,2050.5 599.63,2199.63 677.2,2199.63 904.89,2427.32 1230.71,2427.32 1237.71,2427.32 ccw(c1237.71,2441.32) 1251.71,2441.32 1251.71,2470.32 cw(c1256.71,2470.32) 1261.71,2470.32 1261.71,2402.32 ccw(c1275.71,2402.32) 1289.71,2402.32 1289.71,2470.32 cw(c1294.71,2470.32) 1299.71,2470.32 1299.71,2402.32 ccw(c1313.71,2402.32) 1327.71,2402.32 1327.71,2470.32 cw(c1332.71,2470.32) 1337.71,2470.32 1337.71,2402.32 ccw(c1351.71,2402.32) 1365.71,2402.32 1365.71,2470.32 cw(c1370.71,2470.32) 1375.71,2470.32 1375.71,2402.32 ccw(c1389.71,2402.32) 1403.71,2402.32 1403.71,2451.67 cw(c1408.71,2451.67) 1413.71,2451.67 1413.71,2441.32 ccw(c1427.71,2441.32) 1427.71,2427.32 1452.49,2427.32 1467.66,2427.32 1547.17,2347.81 1606.49,2347.81 1614.31,2340 v1(1615.71,2340)
  Bottom w5: v1(1615.71,2340) 1616.14,2340 1621.5,2345.36 1621.5,2346.24 1624.43,2349.17 1673.87,2349.17 1677.38,2345.66 1701.23,2345.66 1708.54,2338.35 HT1.B54@1735.12,2338.35 HT1.B54@1738.85,2338.35